# Altium PCB Controller-Board.PcbDoc
Units mil, origin at the board's own origin, x right, y up, seen from the top; angles counter-clockwise.
Board outline 1968.5 x 1968.5 mil, 2 copper layers (Top Layer, Bottom Layer); 72 components, 59 nets, 274 pads, 130 vias.
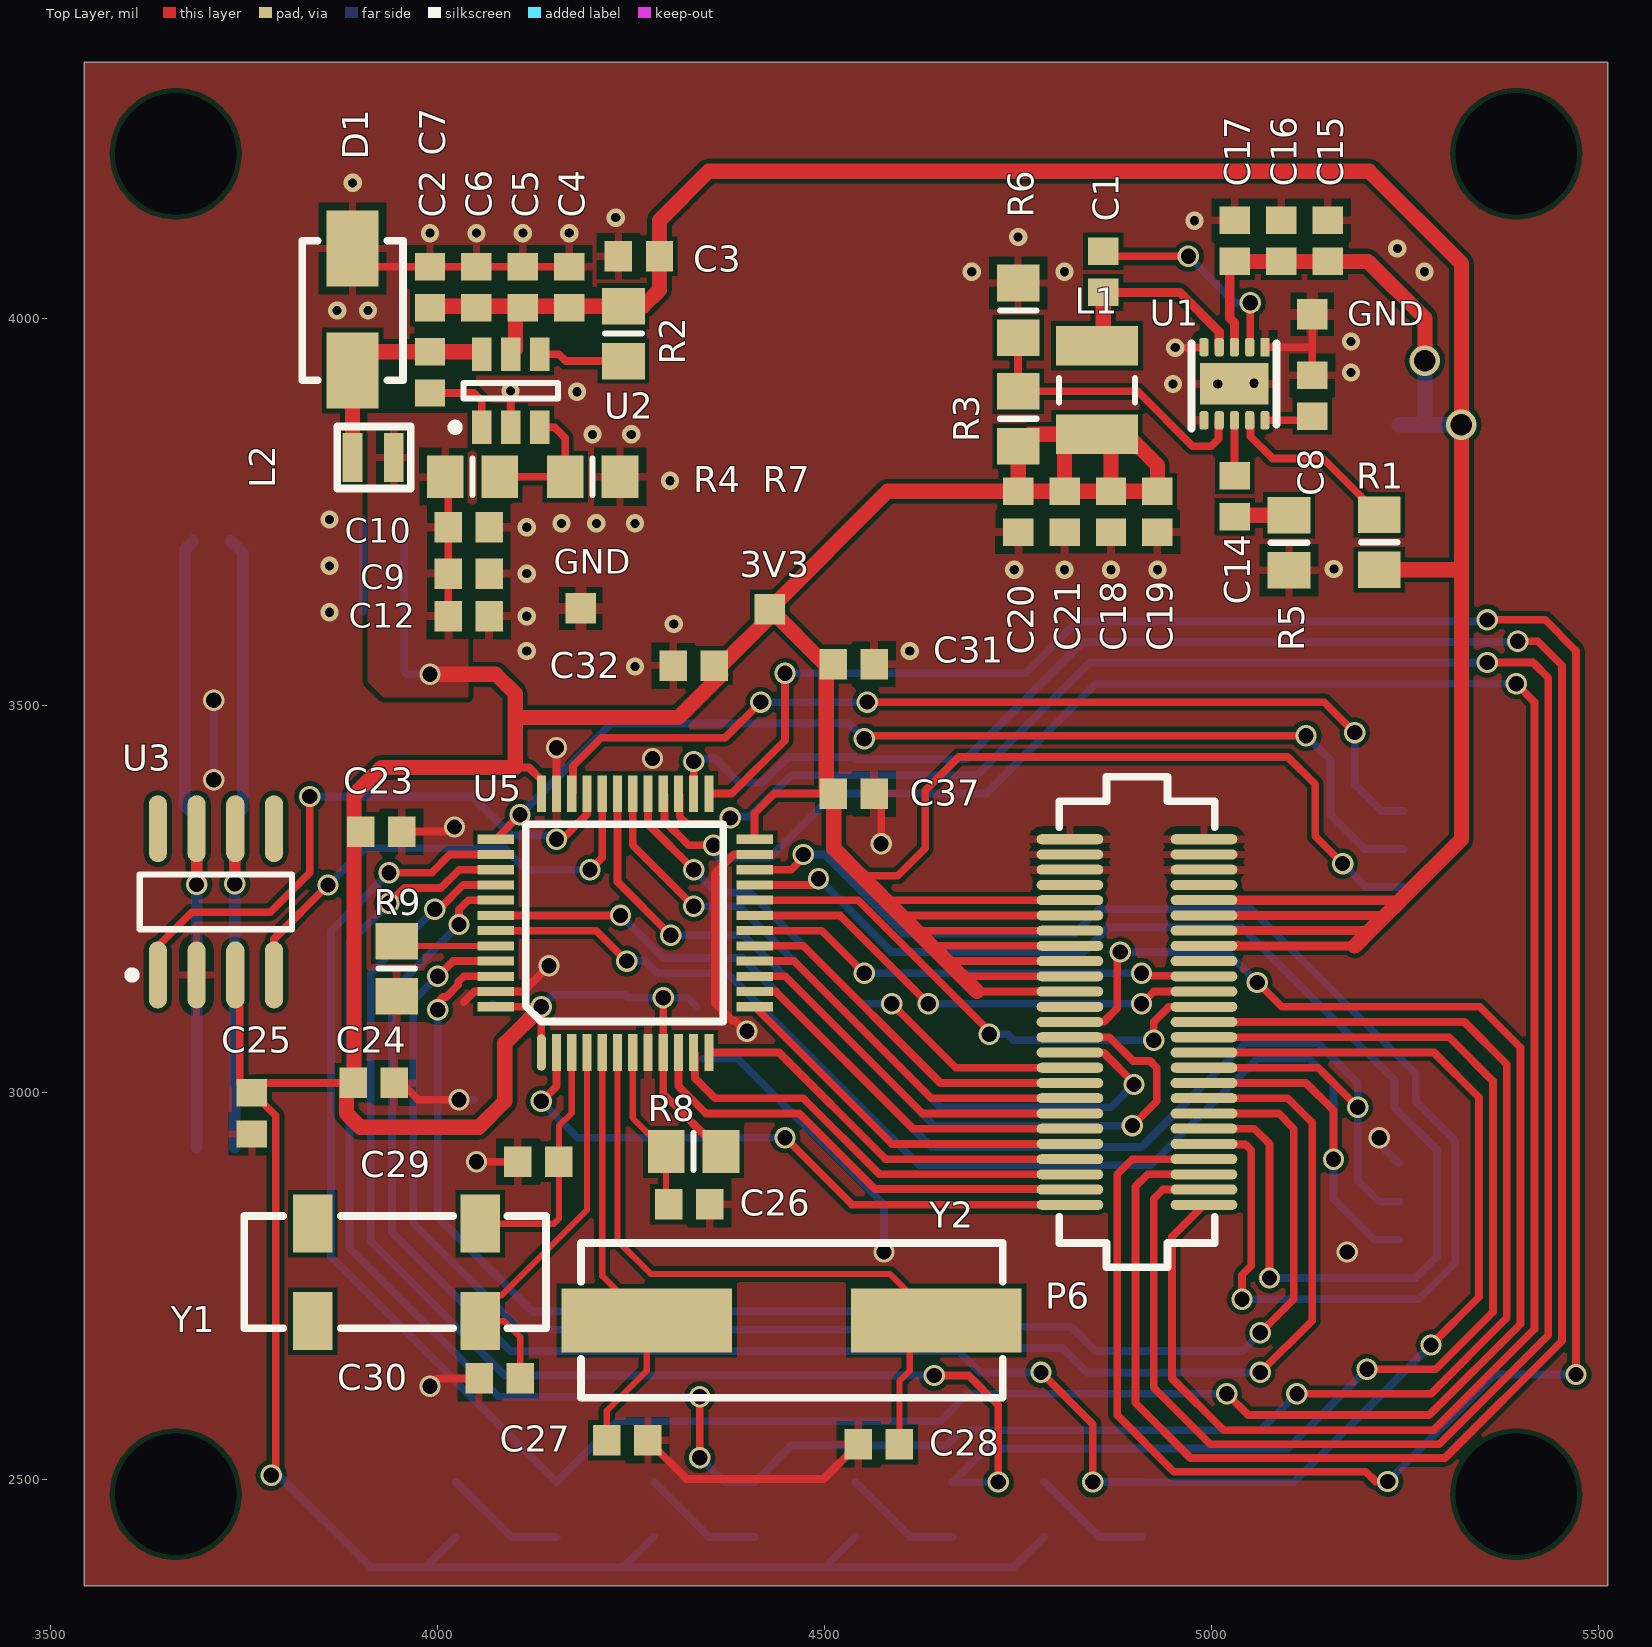
[diagram p0: Top Layer view]
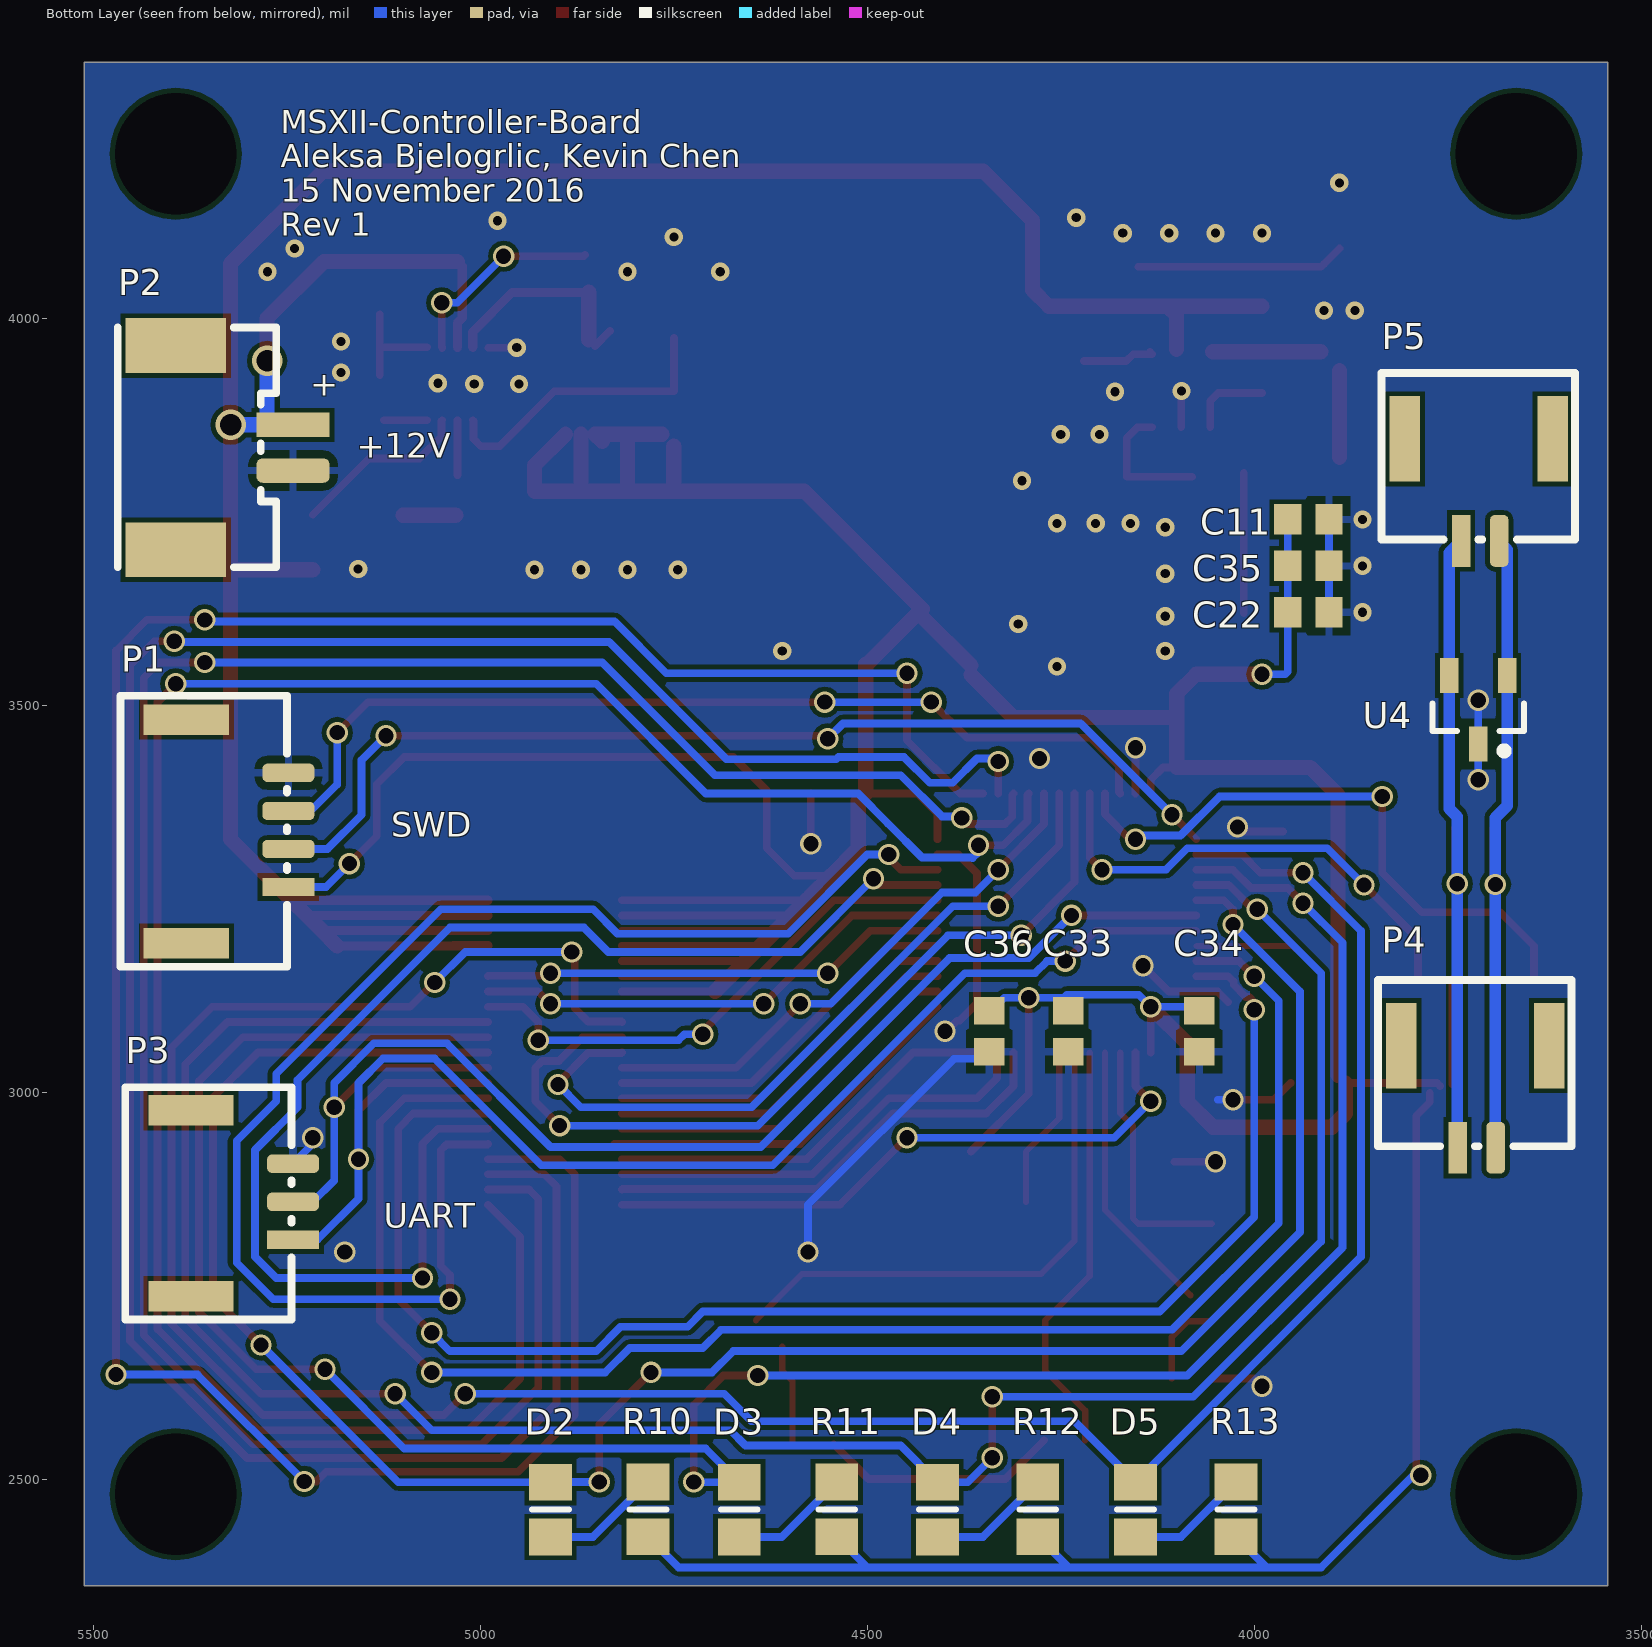
[diagram p1: Bottom Layer view, seen from below]
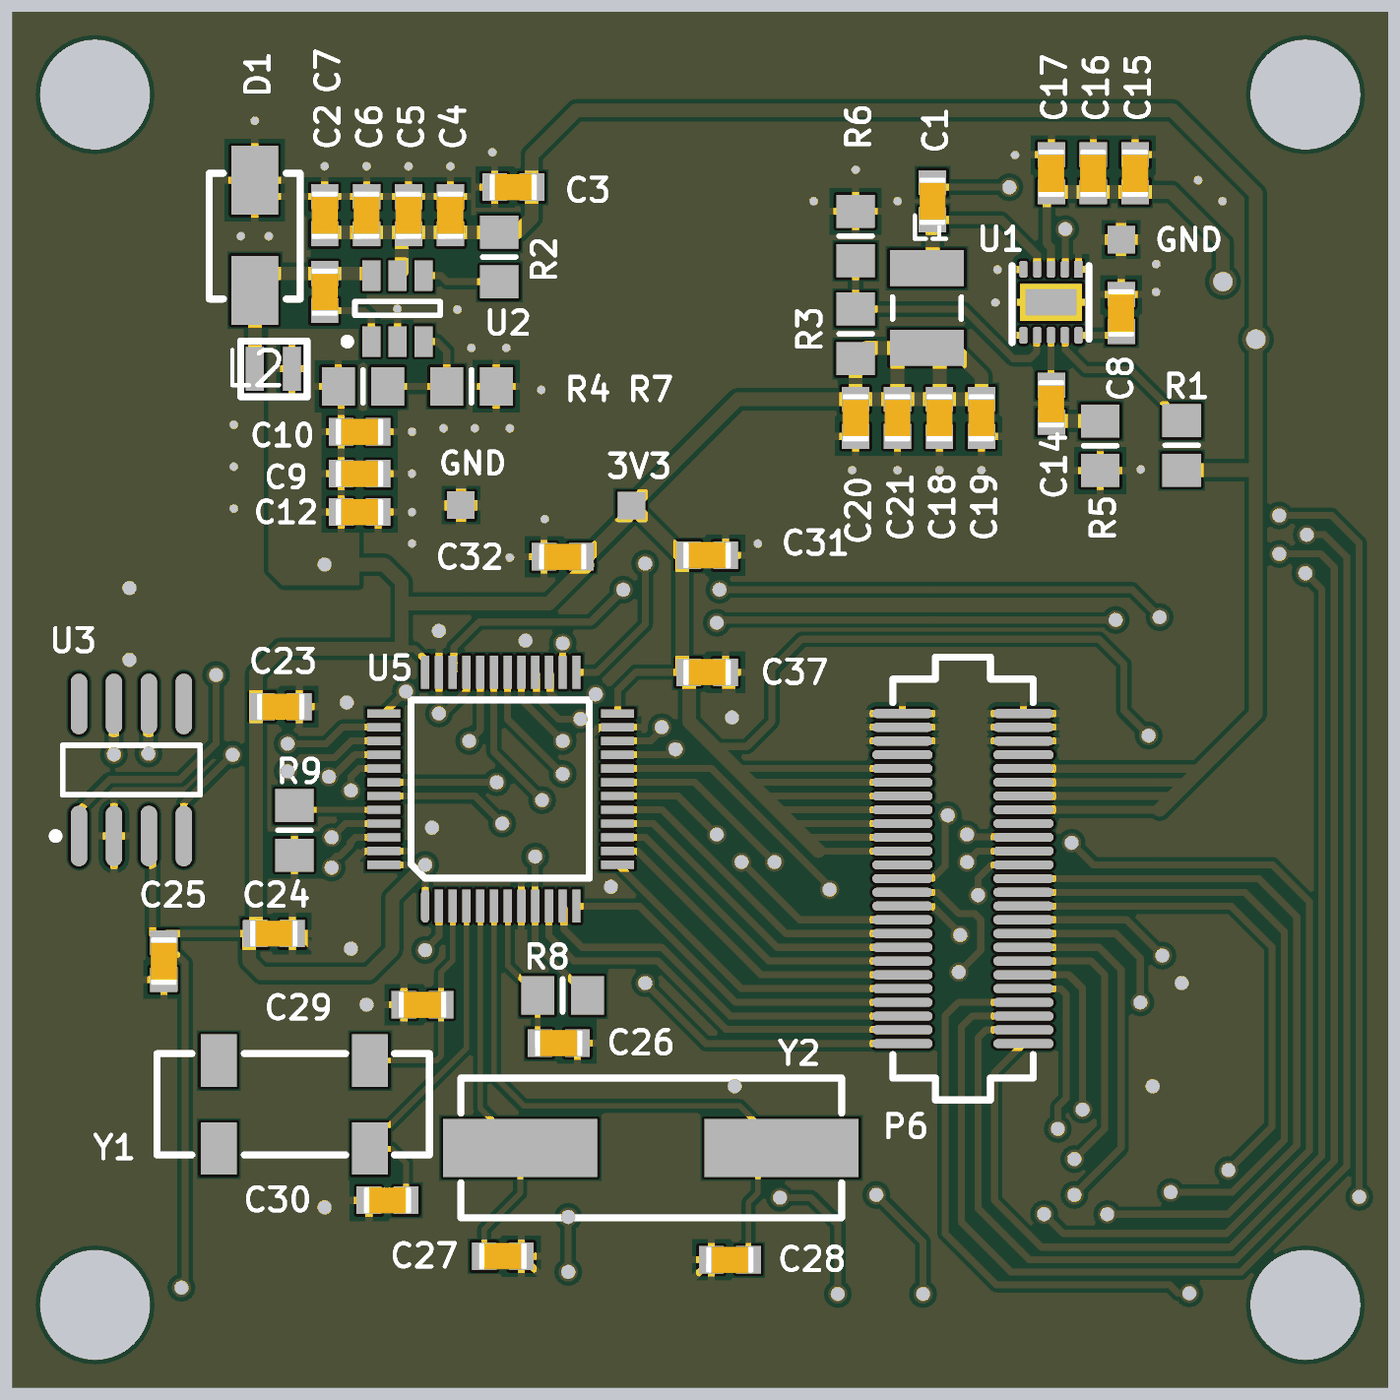
[diagram p2: 3D render of the assembled board from above, using the file's embedded part models]

## Layer stack, top to bottom
Top Solder: solder mask 0.4, Solder Resist, Dk 3.5
Top Layer: signal copper 1.4
Dielectric 1: dielectric 12.6, FR-4, Dk 4.8
Bottom Layer: signal copper 1.4
Bottom Solder: solder mask 0.4, Solder Resist, Dk 3.5

## Board outline
3543.31,2362.2 5511.81,2362.2 5511.81,4330.71 3543.31,4330.71

## Design rules (kind name [scope] priority, off if disabled: settings)
Clearance [All] p1: gap=6
DiffPairsRouting [All] p1: maxlimit=10 minlimit=10 mostfreqgap=10 toplayer_minwidth=15 toplayer_maxwidth=15 toplayer_prefwidth=15 bottomlayer_minwidth=15 bottomlayer_maxwidth=15 bottomlayer_prefwidth=15 maxuncoupledlength=500
PolygonConnect PolygonConnect_Test_Point [HasFootprint('Test Point')] p1: connectstyle=Relief reliefconductorwidth=15 reliefentries=4 polygonreliefangle="90 Angle" airgapwidth=8
PolygonConnect PolygonConnect_3V3_Via [isvia vs InNet('3V3')] p2: connectstyle=Direct reliefconductorwidth=10 reliefentries=4 polygonreliefangle="90 Angle" airgapwidth=10
PolygonConnect PolygonConnect_Via [isvia vs InNet('GND')] p3: connectstyle=Direct reliefconductorwidth=10 reliefentries=4 polygonreliefangle="90 Angle" airgapwidth=10
PolygonConnect [All] p4: connectstyle=Relief reliefconductorwidth=10 reliefentries=4 polygonreliefangle="90 Angle" airgapwidth=10
RoutingVias [All] p1: holewidth=19.68 width=27.56 viastyle="Through Hole" minholewidth=11.81 minwidth=23.62 maxholewidth=248.03 maxwidth=39.37
SolderMaskExpansion [All] p1: expansion=4.02
Width 12V_Width [InNet('+12V')] p1: maxlimit=20 minlimit=10 preferedwidth=20 minimp=50.000000 maximp=50.000000 favimp=50.000000
Width [All] p2: maxlimit=20 minlimit=6 preferedwidth=10 minimp=50.000000 maximp=50.000000 favimp=50.000000
29 further rules are at their usual default settings.

## Classes and differential pairs
differential pair CAN: +CAN_P -CAN_N

## Components (designator, comment, footprint, x,y, rotation, side; value= is the part's Value field where it differs from the comment)
3V3 "Test Point" "Test Point" 4429.13,3624.21 r90 top (schematic designator TP1)
C1 "10nF" 0603 4860,4060 r270 top
C2 "0.1uF" 0603 3990,3930 r90 top
C3 "0.1uF" 0603 4260,4080 r0 top
C4 "0.1uF" 0603 4170,4040 r270 top
C5 "0.1uF" 0603 4110,4040 r270 top
C6 "0.1uF" 0603 4050,4040 r270 top
C7 "0.1uF" 0603 3990,4040 r270 top
C8 "0.1uF" 0603 5130,3900 r270 top
C9 "0.1uF" 0603 4040,3670 r180 top
C10 "0.1uF" 0603 4040,3730 r180 top
C11 "0.1uF" 0603 3930,3740 r0 bottom
C12 "0.1uF" 0603 4040,3615 r180 top
C14 "6800pF" 0603 5030,3770 r270 top
C15 "0.1uF" 0603 5150,4100 r270 top
C16 "0.1uF" 0603 5090,4100 r270 top
C17 "10uF" 0603 5030,4100 r270 top
C18 "22uF" 0603 4870,3750 r90 top
C19 "22uF" 0603 4930,3750 r90 top
C20 "0.1uF" 0603 4750,3750 r90 top
C21 "0.1uF" 0603 4810,3750 r90 top
C22 "0.1uF" 0603 3930,3620 r0 bottom
C23 "10uF" 0603 3927.17,3336.61 r180 top
C24 "4.7uF" 0603 3917.32,3011.81 r180 top
C25 "0.1uF" 0603 3759.84,2972.44 r90 top
C26 "0.1uF" 0603 4325,2855 r180 top
C27 "20pF" 0603 4245,2550 r180 top
C28 "20pF" 0603 4570,2545 r0 top
C29 "20pF" 0603 4130,2910 r0 top
C30 "20pF" 0603 4080,2630 r0 top
C31 "4.7uF" 0603 4537.4,3553.15 r180 top
C32 "4.7uF" 0603 4330.71,3551.18 r0 top
C33 "0.1uF" 0603 4240.16,3078.74 r90 bottom
C34 "0.1uF" 0603 4070.87,3078.74 r90 bottom
C35 "0.1uF" 0603 3930,3680 r0 bottom
C36 "0.1uF" 0603 4342.52,3078.74 r90 bottom
C37 "0.1uF" 0603 4537.4,3385.83 r180 top
D1 "60V 3A" SMA 3890,4090 r270 top
D2 "LED2" 0805 4909.45,2460.63 r90 bottom
D3 "ED2" 0805 4665.35,2460.63 r90 bottom
D4 "ED2" 0805 4409.45,2460.63 r90 bottom
D5 "ED2" 0805 4153.54,2460.63 r90 bottom
GND "Test Point" "Test Point" 4185,3625 r90 top (schematic designator TP2)
GND "Test Point" "Test Point" 5130,4005 r90 top (schematic designator TP2)
L1 "10µH" 1210 4852.36,3907.48 r270 top
L2 "47µH" 445-172964-1-ND 3890,3820 r0 top
P1 "SWD Connector" WM4781CT-ND 5314.96,3307.09 r90 bottom
P2 "12V Power" WM9811CT-ND 5433.7,4118.19 r270 bottom
P3 "UART Connector" WM3918CT-ND 5274.02,2836.22 r90 bottom
P4 "CAN" WM4780CT-ND 3725,3015 r180 bottom
P5 "CAN" WM4780CT-ND 3720.47,3799.21 r180 bottom
P6 "BergStak Receptacle" "609-5227-1-ND/ 609-4602-1-ND - duplicate" 4903.54,3090.55 r180 top
R1 "100K" 0805 5216.54,3710.63 r90 top
R2 "10K" 0805 4240,3980 r270 top
R3 "26.1K" 0805 4750,3870 r270 top
R4 "10K" 0805 4045,3795 r0 top
R5 "6.8k" 0805 5100,3710 r90 top
R6 "10K" 0805 4750,4010 r270 top
R7 "10K" 0805 4200,3795 r180 top
R8 "100K" 0805 4330.71,2923.23 r0 top
R9 "510R" 0805 3946.85,3159.45 r270 top
R10 "Res3" 0805 4783.46,2460.63 r270 bottom
R11 "Res3" 0805 4539.37,2460.63 r270 bottom
R12 "Res3" 0805 4279.53,2460.63 r270 bottom
R13 "Res3" 0805 4023.62,2460.63 r270 bottom
U1 "AP65200FK-7 Buck Switching Regulator" 10-UFDFN 4993.9,3937.6 r180 top
U2 "AOZ1282CI Buck Switching Regulator" SOT23-6 4094.49,3907.48 r90 top
U3 "TCAN332DR CAN Transceiver" SOIC8 3714.57,3245.66 r90 top (schematic designator U?)
U4 "TVS Diode" SOT23 3710.63,3494.09 r270 bottom
U5 "STM32F072CBT6" 48-LQFP 4133.86,3051.18 r0 top
Y1 "32.769 kHz" 4-SOJ 4055,2830 r180 top
Y2 "32MHz" HC49 4270,2705 r0 top

## Footprints (in the part's own frame and the unit in brackets; to place one, negate y for a bottom-side part, rotate by r counter-clockwise, add the part's x,y. Pads: shape width x height; smd on the part's side, far side on the other; paste and mask are expansions set on the pad)
4-SOJ [mm]
  rect 1.3x1.9 smd: 1(0,0) 2(5.5,0) 3(5.5,3.2) 4(0,3.2)
  silkscreen extent -2.16,-0.25 7.75,3.43
10-UFDFN [mm]
  rect 0.3x0.6 smd: 1(-1.905,-0.635)
  rrect50% 0.3x0.6 smd: 2(-1.405,-0.635) 3(-0.905,-0.635) 4(-0.405,-0.635) 5(0.095,-0.635) 6(0.095,1.765) 7(-0.405,1.765) 8(-0.905,1.765) 9(-1.405,1.765) 10(-1.905,1.765)
  rect 2.25x1.36 smd paste-0.2: 11(-0.905,0.565)
  silkscreen extent -2.29,-0.76 0.51,2.03
48-LQFP [mm]
  oval 0.3x1.2 smd: 1(0,0)
  rect 0.3x1.2 smd: 2(0.5,0) 3(1,0) 4(1.5,0) 5(2,0) 6(2.5,0) 7(3,0) 8(3.5,0) 9(4,0) 10(4.5,0) 11(5,0) 12(5.5,0) 25(5.5,8.5) 26(5,8.5) 27(4.5,8.5) 28(4,8.5) 29(3.5,8.5) 30(3,8.5) 31(2.5,8.5) 32(2,8.5) 33(1.5,8.5) 34(1,8.5) 35(0.5,8.5) 36(0,8.5)
  rect 1.2x0.3 smd: 13(7,1.5) 14(7,2) 15(7,2.5) 16(7,3) 17(7,3.5) 18(7,4) 19(7,4.5) 20(7,5) 21(7,5.5) 22(7,6) 23(7,6.5) 24(7,7) 37(-1.5,7) 38(-1.5,6.5) 39(-1.5,6) 40(-1.5,5.5) 41(-1.5,5) 42(-1.5,4.5) 43(-1.5,4) 44(-1.5,3.5) 45(-1.5,3) 46(-1.5,2.5) 47(-1.5,2) 48(-1.5,1.5)
  silkscreen extent -0.51,1.02 5.97,7.49
445-172964-1-ND [mm]
  rect 0.65x1.6 smd: 1(0,0) 2(1.35,0)
  silkscreen extent -0.51,-1.02 1.91,1.02
0603 [mm] "Chip Capacitor, 2-Leads, Body 1.60x0.81mm, IPC Medium Density"
  rect 0.9x1 smd: 1(-0.675,0) 2(0.675,0)
  body extent -0.87,-0.48 0.87,0.48, height 0.9
"609-5227-1-ND/ 609-4602-1-ND - duplicate" [mm] "SSOP, 50-Leads, Body 16.20x3.79mm, Pitch 0.50mm, IPC Medium Density"
  oval 2.187x0.33 smd: 1(-2.2,6) 2(-2.2,5.5) 3(-2.2,5) 4(-2.2,4.5) 5(-2.2,4) 6(-2.2,3.5) 7(-2.2,3) 8(-2.2,2.5) 9(-2.2,2) 10(-2.2,1.5) 11(-2.2,1) 12(-2.2,0.5) 13(-2.2,0) 14(-2.2,-0.5) 15(-2.2,-1) 16(-2.2,-1.5) 17(-2.2,-2) 18(-2.2,-2.5) 19(-2.2,-3) 20(-2.2,-3.5) 21(-2.2,-4) 22(-2.2,-4.5) 23(-2.2,-5) 24(-2.2,-5.5) 25(-2.2,-6) 26(2.2,-6) 27(2.2,-5.5) 28(2.2,-5) 29(2.2,-4.5) 30(2.2,-4) 31(2.2,-3.5) 32(2.2,-3) 33(2.2,-2.5) 34(2.2,-2) 35(2.2,-1.5) 36(2.2,-1) 37(2.2,-0.5) 38(2.2,0) 39(2.2,0.5) 40(2.2,1) 41(2.2,1.5) 42(2.2,2) 43(2.2,2.5) 44(2.2,3) 45(2.2,3.5) 46(2.2,4) 47(2.2,4.5) 48(2.2,5) 49(2.2,5.5) 50(2.2,6)
  silkscreen extent -2.55,-8.05 2.55,8.05
0805 [mm]
  rect 1.2x1.4 smd: 1(-0.903,-0.001) 2(0.897,-0.001)
  silkscreen extent 0,-0.6 0,0.6, body extent -1.08,-0.7 1.07,0.7, height 0.7
1210 [mm]
  rect 1.3x2.7 smd: 1(-1.441,-0.01) 2(1.459,-0.01)
  silkscreen extent -0.39,-1.26 0.41,1.24, body extent -1.69,-1.36 1.71,1.34, height 1.5
HC49 [mm]
  rect 5.6x2.1 smd: 1(0,0) 2(9.5,0)
  silkscreen extent -2.16,-2.54 11.68,2.54
SMA [mm]
  rect 2.5x1.7 smd: 1(0,0) 2(4,0)
  silkscreen extent -0.25,-1.65 4.32,1.65
SOIC8 [mm]
  oval 2.2x0.6 smd: 1(-2.394,1.935) 2(-2.394,0.665) 3(-2.394,-0.605) 4(-2.394,-1.875) 5(2.406,-1.875) 6(2.406,-0.605) 7(2.406,0.665) 8(2.406,1.935)
  silkscreen extent -2.52,-2.47 0.91,2.91, body extent -1.99,-2.47 2.01,2.53, height 1.75
SOT23 [mm] "SOT23, 3-Leads, Body 2.9x1.3mm, Pitch 0.95mm, Lead Span 2.3mm - Reverse Pinning, IPC Medium Density"
  rect 1.15x0.6 smd: 1(1.125,0) 2(-1.125,-0.95) 3(-1.125,0.95)
  silkscreen extent -0.2,-1.5 1.47,1.5, body extent -0.7,-1.5 0.7,1.5, height 1.1
SOT23-6 [mm]
  rect 1.1x0.65 smd: 1(-1.229,0.955) 2(-1.229,0.005) 3(-1.229,-0.945) 4(1.171,-0.945) 5(1.171,0.005) 6(1.171,0.955)
  silkscreen extent -1.35,-1.54 0.22,1.95, body extent -0.93,-1.54 0.87,1.56, height 1.45
"Test Point" [mm]
  rect 1x1 smd: TP(0,0)
WM3918CT-ND [mm]
  rect 0.6x1.7 smd: 1(-0.69,-0.81)
  rrect50% 0.6x1.7 smd: 2(0.56,-0.81) 3(1.81,-0.81)
  rect 1x2.8 smd: ""(-2.54,2.54) ""(3.56,2.54)
  silkscreen extent -3.3,-0.76 4.32,4.7
WM4780CT-ND [mm]
  rect 0.6x1.7 smd: 1(-0.309,-2.207)
  rrect50% 0.6x1.7 smd: 2(0.941,-2.207)
  rect 1x2.8 smd: ""(-2.159,1.143) ""(2.691,1.143)
  silkscreen extent -2.92,-2.16 3.43,3.3
WM4781CT-ND [mm]
  rect 0.6x1.7 smd: 1(-1.071,-1.699)
  rrect50% 0.6x1.7 smd: 2(0.179,-1.699) 3(1.429,-1.699) 4(2.679,-1.699)
  rect 1x2.8 smd: ""(-2.921,1.651) ""(4.429,1.651)
  silkscreen extent -3.68,-1.65 5.21,3.81
WM9811CT-ND [mm]
  rect 0.8x2.4 smd: 1(6.502,4.866)
  rrect50% 0.8x2.4 smd: 2(8.002,4.866)
  rect 1.8x3.3 smd: ""(3.902,1.016) ""(10.602,1.016)
  silkscreen extent 3.3,-0.89 11.18,4.32

## Part data
C1: library part "CAP CER 10nF 50V 5% X7R 0603", "10000pF ±5% 50V Ceramic Capacitor U2J 0603 (1608 Metric)"
C2 C3 C4 C5 C6 C7 C8 C9 C10 C11 C12 C15 C16 C20 C21 C22 C25 C26 C33 C34 C35 C36 C37: library part "CAP CER 0.1UF 50V 10% X7R 0603", "0.10µF ±10% 50V Ceramic Capacitor X7R 0603 (1608 Metric)"
C14: library part "CAP CER 6800pF 50V 10% X7R 0603", "6800pF ±10% 50V Ceramic Capacitor X7R 0603 (1608 Metric)"
C17 C23: library part "CAP CER 10uF 50V 10% X7R 0603", "0.10µF ±10% 50V Ceramic Capacitor X7R 0603 (1608 Metric)"
C18 C19: library part "CAP CER 22uF 25V 20% X5R 0603", "0.22µF ±20% 25V Ceramic Capacitor X5R 0603 (1608 Metric)"
C24 C31 C32: library part "CAP CER 4.7UF 25V 10% X5R 0603", "4.7µF ±10% 25V Ceramic Capacitor X5R 0603 (1608 Metric)"
C27 C28 C29 C30: library part "CAP CER 20PF 100V 5% NP0 0603", "22pF 100V Ceramic Capacitor C0G, NP0 0603 (1608 Metric) 0.063\" L x 0.031\" W (1.60mm x 0.80mm)"
D1: library part "Schottky Diode 60V 3A", "DIODE SCHOTTKY 60V 3A SMA"
D2: "Typical RED, GREEN, YELLOW, AMBER GaAs LED"
D3 D4 D5: library part LED2, "Typical RED, GREEN, YELLOW, AMBER GaAs LED"
L1: library part "IND 10UH POWDERED IRON 0.9A", "10µH Shielded Wirewound Inductor 900mA 420 mOhm Max 1210 (3225 Metric)"
L2: library part "IND 3.3UH FERRITE 1.04A"
P1: library part "4 Position Clik-Mate SWD Connector", "4 Position Receptacle Connector 0.049\" (1.25mm) Surface Mount Tin"
P2: library part "2 Position Clik-Mate 12V Connector", "2 Position Receptacle Connector 0.059\" (1.50mm) Surface Mount Tin"
P3: library part "3 Position Clik-Mate UART Connector", "3 Position Receptacle Connector 0.049\" (1.25mm) Surface Mount Tin"
P4 P5: library part "2 Position Clik-Mate CAN Connector", "2 Position Receptacle Connector 0.049\" (1.25mm) Surface Mount Tin"
P6: library part "BergStak 50 Position Connector Receptacle", "50 Position Connector Receptacle, Center Strip Contacts Surface Mount Gold"
R1 R8: library part "RES 100K OHM 1/8W 5% 0805 SMD", "RES SMD 100K OHM 1% 1/8W 0805"
R2 R4 R6 R7: library part "RES 10K OHM 1/8W 5% 0805 SMD"
R3: library part "RES 26.1K OHM 1/8W 5% 0805 SMD", "RES SMD 26.1K OHM 1% 1/8W 0805"
R5: library part "RES 6.8k OHM 1/8W 0805 SMD", "RES SMD 6.8K OHM 5% 1/8W 0805"
R9: library part "RES 510 OHM 1/8W 0805 SMD", "RES SMD 510 OHM 5% 1/8W 0805"
R10 R11 R12 R13: "Resistor"
U1: "Buck Switching Reg IC Positive Adjustable 0.925V 1 Output 2A 10-UFDFN Exposed Pad"
U2: "IC REG BUCK ADJ 1.2A SOT23-6"
U3: "1/1 Transceiver CAN 8-SOIC"
Y1: library part "CRYSTAL 32.768 kHz 6pF +-20ppm SMD 4-SOJ", "32.768kHz ±20ppm Crystal 6pF 50 kOhm -40°C ~ 85°C Surface Mount 4-SOJ, 5.50mm pitch"
Y2: library part "CRYSTAL 32.000 MHZ 18PF +-30ppm SMD", "32MHz ±30ppm Crystal 18pF 40 Ohm -40°C ~ 85°C Surface Mount HC49/US"

## Free pads (board coordinates)
  round 0 hole 157.48 unplated: ""(3661.42,2480.31) ""(3661.42,4212.6) ""(5393.7,2480.31) ""(5393.7,4212.6)

## Via types
v1: diameter 27.56, hole 19.68, Top Layer to Bottom Layer, tented both sides, 85 vias
v2: diameter 23.62, hole 11.81, Top Layer to Bottom Layer, tented both sides, 43 vias
v3: diameter 39.37, hole 27.56, Top Layer to Bottom Layer, tented both sides, 2 vias

## Nets (pads, with @x,y where several pads share a name; then routed paths per layer and width w, separated by ;. In a path a pad name is that pad's centre, name@x,y a point inside that pad or via, vN(x,y) a via of type N, cw(c..) or ccw(c..) an arc to the next point about the centre after c; other vN are vias at no path point)
3V3: 3V3.TP C9.2 C10.2 C11.2 C12.2 C18.2 C19.2 C20.2 C21.2 C22.2 C23.2 C24.2 C25.2 C31.2 C32.2 C33.2 C34.2 C35.2 C36.2 C37.2 L1.2 L2.2 P1.1 P6.30 P6.31 P6.32 P6.33 P6.34 P6.35 P6.36 R3.2 R4.1 R8.2 R10.2 R11.2 R12.2 R13.2 U3.3 U5.1 U5.9 U5.24 U5.36 U5.48 | length 8593.3
  Top Layer w10: U3.3 3744.02,3145.78 C25.2@3744.02,3010 ; C25.2@3759.88,3007.76 3763.98,3011.85 3882.01,3011.85 3886.36,3016.2 C24.2@3891.85,3021.69 ; C25.2@3773.14,2999.02 3773.14,2986.86 3790.53,2969.47 3790.53,2510.53 v1(3785,2505) ; C12.2@4013.43,3618.94 C9.2 C10.2 4013.43,3794.96 R4.1@4013.43,3800 ; U5.48 v1(4133.86,3110.24) U5.1 ; 4100.28,3419.41 4117.99,3419.41 4133.86,3403.54 U5.36 ; v1(4291.34,3122.05) U5.9 4291.34,2997.88 R8.2 ; C32.2@4366.02,3539.25 C32.2@4366.02,3551.14 ; U5.24 4409.45,3360.24 4435.08,3385.87 C37.2@4502.09,3385.87 ; 3V3.TP@4429.13,3614.25 3V3.TP ; C31.2@4500.15,3553.19 C31.2@4502.09,3553.19 ; 4547.24,3279.53 4594.49,3279.53 4629.92,3314.96 4629.92,3389.76 4673.23,3433.07 5098.43,3433.07 5133.86,3397.64 5133.86,3330.71 v1(5169.29,3295.28) ; 4574.8,3251.97 4578.82,3247.95 P6.30 ; 4598.43,3228.35 P6.31 ; 4618.11,3208.66 P6.32 ; 4637.8,3188.98 P6.33 ; 4657.48,3169.29 P6.34 ; 4677.17,3149.61 P6.35 ; 4696.77,3130 P6.36@4816.93,3130
  Top Layer w19.68: C24.2@3882.01,3011.81 3882.01,2972.32 3899.61,2954.72 4053.15,2954.72 4086.61,2988.19 4086.61,3062.99 v1(4133.86,3110.24) ; C24.2@3891.85,3021.69 3891.85,3336.61 3891.85,3383.98 3927.28,3419.41 4100.28,3419.41 4100.28,3484.21 ; v1(3990,3540) 4075,3540 4100.28,3514.72 4100.28,3484.21 ; C32.2@4366.02,3539.25 4310.98,3484.21 4100.28,3484.21 ; C32.2@4366.02,3551.14 3V3.TP@4429.13,3614.25 ; C31.2@4500.15,3553.19 3V3.TP 4581.5,3776.57 C20.2 ; C31.2@4502.09,3553.15 4502.09,3385.87 4506.48,3381.48 4511.81,3376.14 4511.81,3314.96 4547.24,3279.53 4574.8,3251.97 ; 4578.82,3247.95 4598.43,3228.35 4618.11,3208.66 4637.8,3188.98 4657.48,3169.29 4677.17,3149.61 4696.77,3130 ; R3.2@4750,3834.65 C20.2 ; R3.2@4765.39,3850.04 L1.2 L1.2@4842.52,3840.59 ; L1.2@4810,3849 C21.2 ; L1.2@4870,3850 C18.2 ; L1.2@4889.96,3850.04 4930,3810 C19.2 C18.2 ; C20.2 C21.2 ; C21.2 C18.2
  Bottom Layer w10: v1(3785,2505) 3794.21,2505 3913.39,2385.83 3984.17,2385.83 ; C11.2 C35.2 C22.2 3956.57,3543.43 3960,3540 v1(3990,3540) ; R13.2 3984.17,2385.83 ; C34.2@4070.83,3114.06 4074.65,3110.24 v1(4133.86,3110.24) 4149.49,3125.87 4240.16,3125.87 4242.09,3125.87 4245.91,3122.05 v1(4291.34,3122.05) 4322.91,3122.05 C36.2@4334.76,3110.2 ; R12.2 4240.08,2385.83 ; R11.2 4499.92,2385.83 ; R10.2 4744.02,2385.83 4499.92,2385.83 ; v1(5169.29,3295.28) 5199.64,3264.92 P1.1 ; 3984.17,2385.83 4240.08,2385.83 ; 4240.08,2385.83 4499.92,2385.83
+12V: C3.2 C4.2 C5.2 C6.2 C7.2 C15.2 C16.2 C17.2 P2.1 P6.18 P6.19 P6.20 P6.21 R1.1 R2.1 U1.3 U2.5 | length 4099.9
  Top Layer w11.81: P6.18@4990.16,3189.17 5034.76,3189.17 5034.76,3188.98 5185.04,3188.98 ; P6.19 5204.72,3208.66 ; P6.20 5224.41,3228.35 ; P6.21@4990.16,3247.83 5243.9,3247.83 5244.09,3248.03 ; C17.2@5023.53,4066.95 5023.53,4000.1 5029.53,3994.09 U1.3
  Top Layer w19.68: C7.2@3990,4015.55 4050,4015.55 4110,4015.55 4170,4015.55 R2.1 4265.55,4015.55 4286.57,4036.57 C3.2 4286.57,4126.57 4350,4190 5203.63,4190 5322.8,4070.83 v3(5322.8,3862.4) ; U2.5@4100.4,3959.69 4100.4,4003.83 C5.2 ; C17.2 C16.2 C15.2 5202.17,4073.43 5275.59,4000 v3(5275.59,3944.88) ; 5185.04,3188.98 5204.72,3208.66 5224.41,3228.35 5243.9,3247.83 ; R1.1 5317.91,3675.08 ; 5244.09,3248.03 5322.83,3326.77 v3(5322.8,3862.4)
  Bottom Layer w19.68: P2.1@5242.32,3862.4 v3(5322.8,3862.4) ; P2.1@5275.59,3866.14 v3(5275.59,3944.88)
BOOT0: R9.1 U5.44 | length 129.6
  Top Layer w8: R9.1@3946.81,3185.16 3950.63,3188.98 U5.44
CAN_N: P4.1 P5.1 U3.6 U4.2 | length 868.4
  Top Layer w15: v1(3737.83,3269.33) 3737.83,3339.83 U3.6
  Bottom Layer w15: P5.1 3748.03,3696.93 U4.2 3748.03,3366.14 3737.83,3355.94 v1(3737.83,3269.33) ; v1@3736.22,3267.72 v1(3737.83,3269.33) ; P4.1@3737.83,2928.11 v1(3737.83,3269.33)
CAN_P: P4.2 P5.2 U3.7 U4.3 | length 867.7
  Top Layer w15: v1(3688.39,3268.31) U3.7
  Bottom Layer w15: P5.2 3683.43,3710.98 3673.23,3700.79 U4.3 3673.23,3370.08 3688.62,3354.69 3688.62,3268.31 v1@3688.62,3268.07 ; v1(3688.39,3268.31) v1@3688.62,3268.07 ; P4.2@3688.62,2928.11 v1@3688.62,3268.07 ; v1@3688.98,3267.72 v1@3688.62,3268.07
CAN_RX: U3.4 U5.32 | length 619.8
  Top Layer w10: U3.4 3788.39,3197.83 v1(3858.27,3267.72) ; v1(4196.85,3287.4) 4212.6,3303.15 U5.32
  Bottom Layer w10: v1(3858.27,3267.72) 3905.51,3314.96 4086.61,3314.96 4114.17,3287.4 v1(4196.85,3287.4)
CAN_TX: U3.1 U5.33 | length 792.4
  Top Layer w10: U3.1 3638.39,3188.39 3682.28,3232.28 3783.46,3232.28 3834.65,3283.46 v1(3834.65,3381.89) ; v1(4153.54,3326.77) 4160.79,3326.77 4192.91,3358.89 U5.33
  Bottom Layer w10: v1(3834.65,3381.89) 4044.98,3381.89 4095.26,3331.61 4148.7,3331.61 v1(4153.54,3326.77)
GND: C3.1 C4.1 C5.1 C6.1 C7.1 C8.1 C9.1 C10.1 C11.1 C12.1 C15.1 C16.1 C17.1 C18.1 C19.1 C20.1 C21.1 C22.1 C23.1 C24.1 C25.1 C26.1 C27.1 C28.1 C29.1 C30.1 C31.1 C32.1 C33.1 C34.1 C35.1 C36.1 C37.1 D1.1 GND.TP P1.4 P2.2 P3.3 P6.23 P6.24 P6.25 P6.26 P6.27 P6.28 R5.1 R6.1 R7.1 R9.2 U1.1 U1.5 U1.6 U1.11 U2.2 U3.2 U4.1 U5.8 U5.23 U5.35 U5.47 | length 2288
  Top Layer w10: v1(3710.63,3403.54) v1@3712.6,3401.57 ; D1.1 D1.1@3910,4070 ; D1.1@3913.43,4066.57 C7.1 C6.1 C5.1 4150,4066.57 ; C24.1@3952.87,3011.85 3974.57,2990.15 v1(4027.55,2990.15) ; C23.1@3962.72,3336.65 4015.79,3336.65 v1(4021.65,3342.51) ; v1(3990,2620) 4000,2630 C30.1 ; 4033.46,3116.14 4047.24,3129.92 U5.47 4110.24,3129.92 v1(4143.7,3163.39) ; v1(4050,2910) C29.1 ; U2.2 v2@4094.29,3905.71 ; U5.35 v1(4153.54,3444.88) ; C27.1 4321.57,2500 4498.43,2500 C28.1 ; v1(4399.6,3078.73) 4397.64,3078.73 4384.13,3092.24 4380.82,3092.24 4358.27,3114.8 4358.27,3282.84 4382.51,3307.09 U5.23 ; v1(4572.95,3320.98) C37.1@4572.95,3385.87 ; v2(4953,3962) U1.5@4989.56,3962 ; U1.1 5130,3962.6 ; C8.1 5130,3962.6 ; GND.TP@5130,4005 5130,3962.6 ; v1@5208.66,2946.85 5214.57,2940.94 v1(5216.52,2940.94)
  Bottom Layer w10: v1(3710.63,3403.54) U4.1 v1(3710.63,3506.33) ; C22.1 C35.1 C11.1 ; v1(4021.65,3342.51) 4021.65,3340.56 v1@4023.62,3340.55 ; v1(4027.55,2990.15) 4047.24,2990.15 4045.28,2990.16 ; C36.1@4342.48,3043.19 4387.91,3043.19 4576.77,2854.33 v1(4576.77,2793.31) ; v1@4399.61,3076.77 v1(4399.6,3078.73) ; v1@4570.87,3318.9 v1(4572.95,3320.98) ; v1(5216.52,2940.94) 5216.52,2933.08 P3.3
  other v1: 5175.2,2793.31 4277.56,3431.1
  other v2: 4255,3550 4115,3570 4610,3570 4305,3605 4115,3615 3860,3620 4115,3670 4745,3675 4810,3675 4870,3675 4930,3675 5158,3676 3860,3680 4115,3730 4160,3735 4205,3735 4255,3735 3860,3740 4300,3790 4200,3850 4250,3850 4180,3905 4094,3906 4950,3915 5008,3915 5055,3916 5180,3930 5180,3970 3870,4010 3910,4010 4690,4060 4810,4060 5275,4060 5240,4090 4750,4105 3990,4110 4050,4110 4110,4110 4170,4110 4978,4126 4230,4130 3890,4175
NetC1_1: C1.1 U1.2 | length 269.7
  Top Layer w10: C1.1@4864.68,4081.89 4866.57,4080 v1(4970,4080) ; U1.2@5049.21,3961.54 U1.2 5050,3963.39 v1(5050,4020)
  Bottom Layer w10: v1(4970,4080) 5030,4020 v1(5050,4020)
NetC1_2: C1.2 L1.1 U1.4 | length 279.2
  Top Layer w10: L1.1@4832.64,3983.54 L1.1
  Top Layer w11.81: C1.2 4958.7,4033.43 5009.84,3982.28 U1.4
  Top Layer w20: L1.1@4860,3972.24 C1.2
NetC2_1: C2.1 U2.1 | length 105.2
  Top Layer w10: C2.1 4046.57,3903.43 4056.89,3893.11 U2.1
NetC2_2: C2.2 D1.2 L2.1 U2.6 | length 252.4
  Top Layer w19.68: L2.1 D1.2 ; D1.2@3914.06,3956.57 C2.2 U2.6@4053.9,3956.57
NetC8_2: C8.2 U1.10 | length 55.8
  Top Layer w10: U1.10 C8.2@5124.68,3868.11
NetC14_1: C14.1 U1.8 | length 71.1
  Top Layer w10: C14.1@5029.53,3797.05 U1.8
NetC14_2: C14.2 R5.2 | length 68.1
  Top Layer w19.68: C14.2@5031.89,3745.32 R5.2
NetD2_1: D2.1 R10.1 | length 155.4
  Bottom Layer w10: R10.1 4854.61,2425.08 D2.1
NetD3_1: D3.1 R11.1 | length 155.4
  Bottom Layer w10: R11.1 4610.51,2425.08 D3.1
NetD4_1: D4.1 R12.1 | length 159.3
  Bottom Layer w10: R12.1 4350.67,2425.08 D4.1
NetD5_1: D5.1 R13.1 | length 159.3
  Bottom Layer w10: R13.1 4094.76,2425.08 D5.1
NetR1_2: R1.2 U1.9 | length 229.5
  Top Layer w10: U1.9 5050.12,3867.2 5050.12,3847.52 5078.74,3818.9 5143.62,3818.9 R1.2
NetR2_2: R2.2 U2.4 | length 96.4
  Top Layer w10: U2.4@4134.84,3956.73 U2.4 4156.42,3953.58 4165.32,3944.68 R2.2@4219.96,3944.68
NetR3_1: R3.1 R6.2 U1.7 | length 385.8
  Top Layer w10: R6.2 R3.1 4904.45,3905.55 4975.35,3834.65 4999.44,3834.65 5008.94,3844.15 5008.94,3867.21 U1.7
NetR4_2: R4.2 R7.2 U2.3 | length 173.3
  Top Layer w10: R4.2@4080.39,3795.04 R7.2 4164.69,3845.31 4150.91,3859.09 U2.3
NRST: C26.2 R8.1 U5.7 | length 210.8
  Top Layer w8: U5.7 4251.97,2966.38 R8.1 C26.2@4295.16,2858.27
OSC32_IN: C29.2 U5.3 Y1.1 | length 325.8
  Top Layer w8: Y1.1 4150,2830 4156.57,2836.57 C29.2 4156.57,2956.29 4173.23,2972.94 U5.3
OSC32_OUT: C30.2 U5.4 Y1.4 | length 472.9
  Top Layer w8: Y1.4 4085.98,2704.02 4106.57,2683.43 C30.2 ; 4082.5,2737.5 4192.91,2847.91 U5.4
OSC_IN: C27.2 U5.5 Y2.1 | length 546.3
  Top Layer w8: U5.5 4212.6,2762.4 Y2.1 4270,2640 4218.43,2588.43 C27.2
OSC_OUT: C28.2 U5.6 Y2.2 | length 829.3
  Top Layer w8: U5.6 4232.28,2807.72 4275,2765 4584.02,2765 Y2.2 ; C28.2 4596.57,2626.57 4610,2640 Y2.2@4610,2670.98
PA0: P6.49 U5.10 | length 604.7
  Top Layer w10: U5.10 4311.02,3007.87 4346.46,2972.44 4466.85,2972.44 4564.57,2874.72 4816.22,2874.72 P6.49
PA1: P6.48 U5.11 | length 569.9
  Top Layer w10: U5.11 4332.4,3049.49 4332.4,3017.99 4358.27,2992.13 4472.44,2992.13 4570.87,2893.7 P6.48
PA2/USART2_TX: P6.47 U5.12 | length 523.6
  Top Layer w10: U5.12 4440.94,3051.18 4578.74,2913.39 P6.47
PA3/USART2_RX: P6.46 U5.13 | length 490.7
  Top Layer w10: U5.13 4586.61,2933.07 P6.46 P6.46@4826.77,2933.07
PA4/SPI1_NSS: P6.45 U5.14 | length 480.9
  Top Layer w10: U5.14 4437.01,3129.92 4614.17,2952.76 P6.45
PA5/SPI1_SCK: P6.44 U5.15 | length 480.9
  Top Layer w10: U5.15 4448.82,3149.61 4625.99,2972.44 P6.44
PA6/SPI1_MISO: P6.43 U5.16 | length 480.9
  Top Layer w10: U5.16 4460.63,3169.29 4637.8,2992.13 P6.43
PA7/SPI1_MOSI: P6.42 U5.17 | length 480.9
  Top Layer w10: U5.17 4472.44,3188.98 4649.61,3011.81 P6.42
PA8: P6.41 U5.29 | length 715.1
  Top Layer w10: U5.29 4271.65,3346.46 v1(4330.71,3287.4) ; v1(4586.6,3114.17) 4669.28,3031.5 P6.41
  Bottom Layer w10: v1(4330.71,3287.4) 4360.08,3258.03 4403.39,3258.03 4547.25,3114.17 v1(4586.6,3114.17)
PA9: P6.40 U5.30 | length 968
  Top Layer w10: U5.30 4251.97,3318.9 v1(4330.71,3240.16) ; P6.40 4817.64,3050.47 4860.96,3050.47 4899.62,3011.81 v1(4899.62,3009.83)
  Bottom Layer w10: v1(4330.71,3240.16) 4389.76,3240.16 4649.61,2980.32 4870.11,2980.32 v1(4899.62,3009.83)
PA10: P6.39 U5.31 | length 1126.3
  Top Layer w10: U5.31 4232.28,3271.65 v1(4301.18,3202.76) ; P6.39 4867.94,3070.87 4898.53,3040.27 4920.36,3040.27 4929.13,3031.5 4929.13,2988.19 v1(4897.64,2956.69)
  Bottom Layer w10: v1(4301.18,3202.76) 4395.67,3202.76 4641.73,2956.69 v1(4897.64,2956.69)
PA15: D5.2 P6.38 U5.38 | length 3508.3
  Top Layer w10: v1(3937.01,3283.46) 3992.13,3283.46 4015.75,3307.09 U5.38 ; P6.38 4817.64,3091.26 4860.96,3091.26 4877.95,3108.25 4877.95,3177.17 v1(4881.88,3181.1) ; v1(5019.69,2610.24) 5047.24,2582.68 5281.16,2582.68 5399.29,2700.81 5399.29,3057.4 5346.46,3110.24 5090.55,3110.24 v1(5059.06,3141.73)
  Bottom Layer w10: v1(3937.01,3283.46) 3862.2,3208.66 3862.2,2787.25 D5.2 4232.36,2574.8 4649.61,2574.8 4685.04,2610.24 v1(5019.69,2610.24) ; v1(4881.88,3181.1) 5019.69,3181.1 v1(5059.06,3141.73)
PB0: P6.16 U5.18 | length 605.2
  Top Layer w10: U5.18 4496.05,3208.66 v1(4551.18,3153.53) ; v1(4909.45,3153.54) 4912.68,3150.32 4989.44,3150.32 P6.16
  Bottom Layer w10: v1(4551.18,3153.53) v1(4909.45,3153.54)
PB1: P6.15 U5.19 | length 634.5
  Top Layer w10: U5.19 4519.69,3228.35 v1(4633.86,3114.17) ; v1(4909.45,3114.17) 4925.2,3129.92 P6.15
  Bottom Layer w10: v1(4633.86,3114.17) v1(4909.45,3114.17)
PB2: P6.14 U5.20 | length 689.8
  Top Layer w10: U5.20 4543.31,3248.03 4712.6,3078.74 v1(4712.6,3074.8) ; v1(4925.19,3066.92) 4925.19,3090.54 4944.88,3110.24 P6.14
  Bottom Layer w10: v1(4712.6,3074.8) 4736.22,3074.8 4744.1,3066.92 v1(4925.19,3066.92)
PB3: D4.2 P6.13 U5.39 | length 3118.7
  Top Layer w10: v1(3937.01,3244.09) 3956.69,3263.78 4003.94,3263.78 4027.56,3287.4 U5.39 ; v1(4338.58,2527.56) v1(4338.58,2606.3) ; P6.13 5326.77,3090.55 5381.42,3035.91 5381.42,2708.21 5283.44,2610.24 v1(5110.24,2610.24)
  Bottom Layer w10: v1(3937.01,3244.09) 3885.83,3192.91 3885.83,2799.21 4078.74,2606.3 v1(4338.58,2606.3) ; v1(4338.58,2527.56) 4370.2,2495.95 D4.2 4456.77,2543.31 4657.48,2543.31 4677.17,2562.99 5062.99,2562.99 v1(5110.24,2610.24)
PB4: D3.2 P6.12 U5.40 | length 3097.3
  Top Layer w10: v1(3996.06,3236.21) 4001.65,3236.21 4033.15,3267.72 U5.40 ; v1(4641.73,2633.86) 4686.14,2633.86 4724.41,2595.59 v1(4724.41,2496.06) ; P6.12 5307.09,3070.87 5363.54,3014.41 5363.54,2715.61 5289.66,2641.73 v1(5200.79,2641.73)
  Bottom Layer w10: v1(3996.06,3236.21) 3913.39,3153.54 3913.39,2807.09 4086.61,2633.86 v1(4641.73,2633.86) ; v1(4724.41,2496.06) 4724.29,2495.95 D3.2 4708.74,2539.37 5098.43,2539.37 v1(5200.79,2641.73)
PB5: D2.2 P6.11 U5.41 | length 2824
  Top Layer w10: v1(4027.55,3216.53) 4027.56,3236.22 4039.37,3248.03 U5.41 ; v1(4779.53,2637.8) 4846.46,2570.87 v1(4846.46,2496.06) ; P6.11 5287.4,3051.18 5345.67,2992.91 5345.67,2735.43 v1(5283.46,2673.23)
  Bottom Layer w10: v1(4027.55,3216.53) 3940.94,3129.92 3940.94,2818.9 4094.49,2665.35 4673.23,2665.35 4700.79,2637.8 v1(4779.53,2637.8) ; v1(4846.46,2496.06) 4909.29,2496.06 D2.2 5106.18,2495.95 v1(5283.46,2673.23)
PB8/I2C1_SCL: P6.8 U5.45 | length 2092.7
  Top Layer w10: v1(4000,3149.61) 4019.69,3169.29 U5.45 ; P6.8 5098.43,2992.13 5129.92,2960.63 5129.92,2704.72 v1(5062.99,2637.8)
  Bottom Layer w10: v1(4000,3149.61) 3968.5,3118.11 3968.5,2830.71 4106.3,2692.91 4688.98,2692.91 4712.6,2669.29 4807.09,2669.29 4838.58,2637.8 v1(5062.99,2637.8)
PB9/I2C1_SDA: P6.7 U5.46 | length 1919.2
  Top Layer w10: v1(4000,3106.3) 4000,3116.14 4006.81,3122.95 4011.04,3122.95 4026.65,3138.57 4026.65,3142.8 4033.46,3149.61 U5.46 ; P6.7 5086.62,2972.44 5106.3,2952.76 5106.3,2732.28 v1(5062.99,2688.98)
  Bottom Layer w10: v1(4000,3106.3) 4000,2838.58 4122.05,2716.54 4712.6,2716.54 4732.28,2696.85 4818.9,2696.85 4850.39,2665.35 5039.37,2665.35 v1(5062.99,2688.98)
PB10/USART3_TX/I2C2_SCL: P6.6 U5.21 | length 1708.9
  Top Layer w10: U5.21 4484.25,3267.72 v1(4492.13,3275.59) ; P6.6 5055.12,2952.76 5074.8,2933.07 v1(5074.8,2759.84)
  Bottom Layer w10: v1(4492.13,3275.59) 4586.61,3181.1 4834.65,3181.1 4866.14,3212.6 5039.37,3212.6 5236.22,3015.75 5236.22,2980.32 5291.34,2925.2 5291.34,2787.4 5263.78,2759.84 v1(5074.8,2759.84)
PB11/USART3_RX/I2C2_SDA: P6.5 U5.22 | length 1830.7
  Top Layer w10: U5.22 4456.69,3287.4 4472.43,3303.14 v1(4472.43,3307.08) ; P6.5 4990.87,2932.36 5043.85,2932.36 5051.18,2925.03 5051.18,2775.59 5039.37,2763.78 v1(5039.37,2732.28)
  Bottom Layer w10: v1(4472.43,3307.08) 4500.01,3307.08 4602.36,3204.72 4822.83,3204.72 4854.33,3236.22 5051.18,3236.22 5263.78,3023.62 5263.78,2988.19 5314.96,2937.01 5314.96,2779.53 5267.72,2732.28 v1(5039.37,2732.28)
PB12/SPI2_NSS: P6.4 U5.25 | length 3318.3
  Top Layer w10: U5.25 4379.92,3385.83 4448.82,3454.72 v1(4448.82,3541.34) ; P6.4 4897.64,2913.39 4877.95,2893.7 4877.95,2582.68 4951.26,2509.37 5199.29,2509.37 5211.74,2496.93 ; v1(5356.29,3610.23) 5431.11,3610.23 5470.79,3570.55 v1(5470.79,2635)
  Bottom Layer w10: v1(4448.82,3541.34) 4759.84,3541.34 4826.78,3608.28 5356.29,3608.28 v1(5356.29,3610.23) ; v1(5227.6,2496.93) 5365.67,2635 v1(5470.79,2635)
PB13/SPI2_SCK: P6.3 U5.26 | length 3162.5
  Top Layer w10: U5.26 v1(4330.7,3427.16) ; P6.3 4917.32,2893.7 4901.57,2877.95 4901.57,2598.43 4972.76,2527.24 5301.56,2527.24 5452.91,2678.6 5452.91,3551.01 5421.25,3582.67 v1(5395.66,3582.67)
  Bottom Layer w10: v1(4330.7,3427.16) 4330.7,3431.09 4358.28,3431.09 4389.76,3399.61 4419.29,3399.61 4452.76,3433.07 4537.11,3433.07 4540.14,3430.04 4682.01,3430.04 4833.74,3581.77 5394.76,3581.77 v1(5395.66,3582.67)
PB14/SPI2_MISO: P6.2 U5.27 | length 3013.2
  Top Layer w10: U5.27 4312.72,3384.13 4312.72,3355.95 4322.21,3346.46 4370.08,3346.46 v1(4377.95,3354.33) ; P6.2 4937.01,2874.02 4925.2,2862.2 4925.2,2618.11 4998.19,2545.12 5294.16,2545.12 5435.04,2686 5435.04,3535.43 5415.35,3555.12 v1(5356.3,3555.12)
  Bottom Layer w10: v1(4377.95,3354.33) 4379.92,3356.3 4403.54,3356.3 4456.69,3409.45 4696.85,3409.45 4842.52,3555.12 v1(5356.3,3555.12)
PB15/SPI2_MOSI: P6.1 U5.28 | length 2890.9
  Top Layer w10: U5.28 4293.03,3384.13 4293.03,3350.36 4324.49,3318.9 v1(4356.3,3318.9) ; P6.1 4948.82,2812.99 4948.82,2629.92 5015.75,2562.99 5286.76,2562.99 5417.17,2693.4 5417.17,3504.09 v1(5393.7,3527.56)
  Bottom Layer w10: v1(4356.3,3318.9) 4356.3,3310.13 4364.17,3302.25 4365.07,3303.15 4429.43,3303.15 4473.5,3347.23 4473.5,3347.52 4511.81,3385.83 4708.66,3385.83 4850.39,3527.56 v1(5393.7,3527.56)
PC13: P6.50 U5.2 | length 809.7
  Top Layer w10: v1(4133.86,2988.19) 4153.54,3007.87 U5.2 ; v1(4448.82,2940.94) 4535.43,2854.33 P6.50
  Bottom Layer w10: v1(4133.86,2988.19) 4181.1,2940.94 v1(4448.82,2940.94)
SWCLK: P1.2 U5.37 | length 1347.2
  Top Layer w10: U5.37 v1(4106.3,3358.27) ; v1(4551.18,3456.69) 4555.12,3460.63 v1(5122.05,3460.63)
  Bottom Layer w10: v1(4106.3,3358.27) 4224.41,3476.38 4531.5,3476.38 v1(4551.18,3456.69) ; v1(5122.05,3460.63) 5153.54,3429.13 5153.54,3358.27 5197.68,3314.13 P1.2
SWDIO: P1.3 U5.34 | length 1241.1
  Top Layer w10: U5.34 4174.92,3387.52 4174.92,3421.53 4211.14,3457.76 4371.14,3457.76 v1(4417.32,3503.94) ; v1(4555.12,3503.94) 5145.67,3503.94 v1(5185.04,3464.57)
  Bottom Layer w10: v1(4417.32,3503.94) v1(4555.12,3503.94) ; v1(5185.04,3464.57) 5185.04,3397.64 5219.33,3363.35 P1.3
USART1_RX: P3.1 P6.9 U5.43 | length 1779.6
  Top Layer w10: U5.43 4204.72,3208.66 v1(4244.09,3169.29) ; P6.9 5122.05,3011.81 5157.48,2976.38 v1(5157.48,2913.39)
  Bottom Layer w10: v1(4244.09,3169.29) 4267.72,3169.29 4283.46,3153.54 4374.02,3153.54 4622.05,2905.51 4921.26,2905.51 5059.06,3043.31 5125.98,3043.31 5157.48,3011.81 v1(5157.48,2913.39) 5157.48,2862.2 5210.63,2809.06 P3.1
USART1_TX: P3.2 P6.10 U5.42 | length 1725.3
  Top Layer w10: U5.42 v1(4236.22,3228.35) ; P6.10 5137.78,3031.5 v1(5188.98,2980.3)
  Bottom Layer w10: v1(4236.22,3228.35) 4291.34,3173.23 4393.7,3173.23 4637.8,2929.13 4909.45,2929.13 5043.31,3062.99 5137.8,3062.99 5188.98,3011.81 v1(5188.98,2980.3) 5188.98,2885.83 5216.54,2858.27 P3.2
pads on no net: P1. P2. P3. P4. P5. P6.17 P6.22 P6.29 P6.37 U3.5 U3.8 Y1.2 Y1.3

## Polygon pours and split planes (outlines as drawn)
GND on Bottom Layer "GND" (solid, remove dead copper, pour order 3): 3543.31,4330.71 5511.81,4330.71 5511.81,2362.2 3543.31,2362.2
3V3 on Top Layer "3V3" (solid, remove dead copper, pour order 0): 3909.59,3877 3909.59,3760 3909.59,3530 3929.59,3510 4039.59,3510 4039.59,3570 4039.59,3877 3980.59,3877 3944.59,3877
GND on Top Layer "GND" (solid, pour order 2): 3543.31,2362.2 5511.81,2362.2 5511.81,4330.71 3543.31,4330.71

## Other copper
Top Layer:
  pour cut-out: 4775,3130 4775,3031.5 4773.5,3030 4615,3030 4615,3130
  pour cut-out: 4925.2,2618.11 4895,2618.11 4895,2605 4972.76,2527.24 4990.63,2545.12 4998.19,2545.12
  pour cut-out: 4455,3285 4630,3110 4655,3135 4480,3310
  pour cut-out: 4425,3100 4600,2925 4625,2950 4450,3125
  pour cut-out: 4475,3050 4474.49,3049.49 4332.4,3049.49 4332.4,2997.6 4337.87,2992.13 4472.44,2992.13
  pour cut-out: 5060,2970 5060,2765 5110,2765 5110,2970
  pour cut-out: 4855,3030 4855,2895 4950,2895 4950,3030
  pour cut-out: 4860,3120 4860,3040 4940,3040 4940,3120
  pour cut-out: 3970,4040 3970,3942.49 3931.53,3942.49 3931.53,3883.49 3964.31,3883.49 4050,3883.49 4050,3930 4120,3930 4120,3950 4270,3950 4270,4040

## Silkscreen, mask and mechanical layers (free items; w line width, h text height)
Bottom Overlay:
  text "MSXII-Controller-Board / Aleksa Bjelogrlic, Kevin Chen / 15 November 2016 / Rev 1" at 5257.87,4106.3 h29.53
  text "+" at 5220,3900 h31.5
  text "+12V" at 5160,3820 h31.5
  text "SWD" at 5115,3330 h31.5
  text "UART" at 5125,2825 h31.5
Mechanical 1:
  the board outline again, w10